# EAGLE board LinxBreakout (EAGLE 7.7.0)
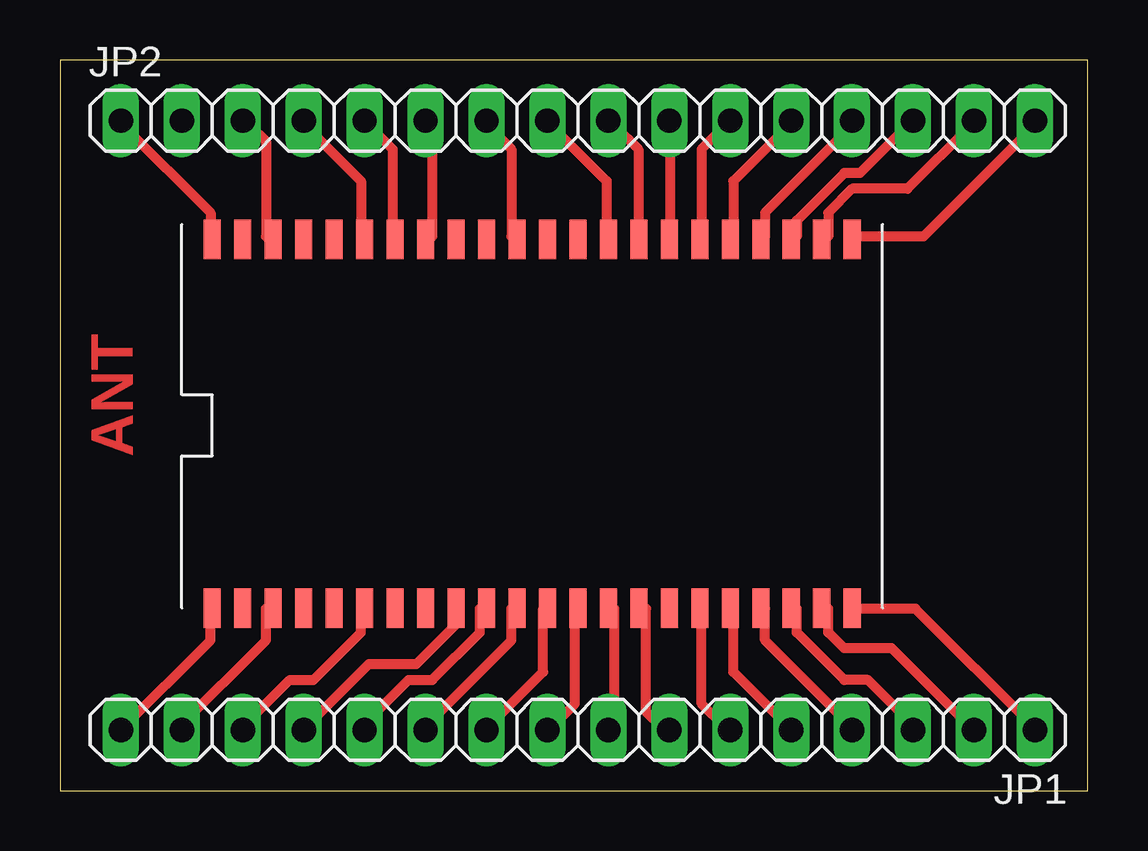
[diagram p0: board, top side]
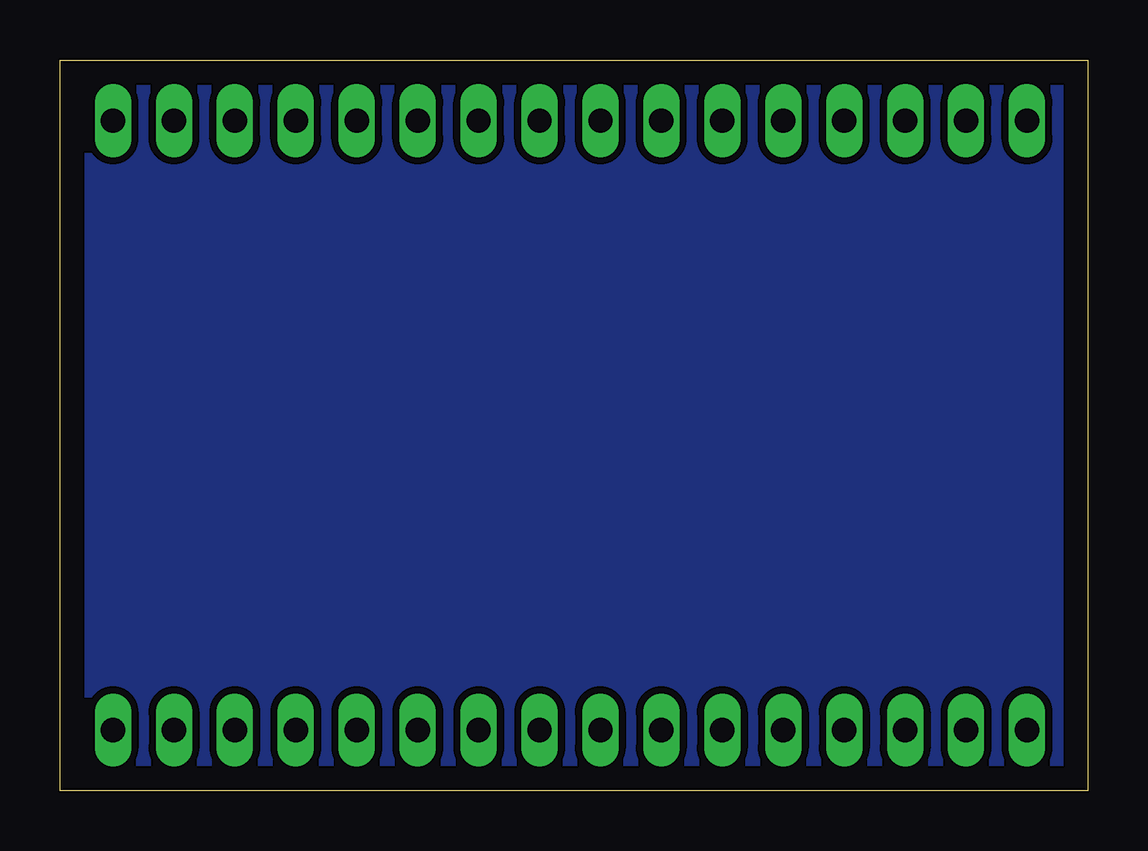
[diagram p1: board, bottom side, seen from below]

Size 42.85 x 30.47 mm. Coordinates in mm from the lower left corner, seen from the top.
Outline: 0,0 42.85,0 42.85,30.47 0,30.47 0,0
Copper layers (1*16): Top 0.035mm / dielectric 1.5mm / Bottom 0.035mm
Design rules "default *": minimum track width 16mil, minimum drill 24mil, track to track 10mil, track to pad 10mil, pad to pad 8mil, via to via 8mil, smd to smd 8mil, copper to edge 40mil, drill to drill 8mil, minimum pad ring 10mil, minimum via ring 8mil, stop-mask expansion 4mil, vias tented up to drill 0mil, thermal gap 10mil

## Footprints (pad centres in the part's own frame; a part is rotated, then mirrored left to right if it is on the bottom)
1X16 = drill 1.016 long: 1 -19.05,0; 2 -16.51,0; 3 -13.97,0; 4 -11.43,0; 5 -8.89,0; 6 -6.35,0; 7 -3.81,0; 8 -1.27,0; 9 1.27,0; 10 3.81,0; 11 6.35,0; 12 8.89,0; 13 11.43,0; 14 13.97,0; 15 16.51,0; 16 19.05,0
TRM-900-NT = smd 0.711 x 1.651: PIN1-GND 0,0; PIN2-NC 1.27,0; PIN3-GND 2.54,0; PIN4-NC 3.81,0; PIN5-NC 5.08,0; PIN6-GND 6.35,0; PIN7-NC 7.62,0; PIN8-NC 8.89,0; PIN9-TRPT/PKT 10.16,0; PIN10-CHN_SEL0 11.43,0; PIN11-GND 12.7,0; PIN12-CHN_SEL1 13.97,0; PIN13-CHN_SEL2 15.24,0; PIN14-LVL_ADJ 16.51,0; PIN15-READY 17.78,0; PIN16-NC 19.05,0; PIN17-GND 20.32,0; PIN18-T/R_SEL 21.59,0; PIN19-BAUD0 22.86,0; PIN20-BAUD1 24.13,0; PIN21-RSSI 25.4,0; PIN22-GND 26.67,0; PIN23-GND 26.67,15.367; PIN24-POWER_DOWN 25.4,15.367; PIN25-VCC 24.13,15.367; PIN26-STANDBY 22.86,15.367; PIN27-CMD_DATA_IN 21.59,15.367; PIN28-GND 20.32,15.367; PIN29-CMD_DATA_OUT 19.05,15.367; PIN30-CMD_DATA_TYPE 17.78,15.367; PIN31-CMD_DATA_BAUD 16.51,15.367; PIN32-NC 15.24,15.367; PIN33-NC 13.97,15.367; PIN34-GND 12.7,15.367; PIN35-NC 11.43,15.367; PIN36-NC 10.16,15.367; PIN37-DATA_OUT 8.89,15.367; PIN38-DATA_IN 7.62,15.367; PIN39-GND 6.35,15.367; PIN40-NC 5.08,15.367; PIN41-NC 3.81,15.367; PIN42-GND 2.54,15.367; PIN43-ANTENNA 1.27,15.367; PIN44-GND 0,15.367

## Placement (x,y rotation side)
JP1  [1X16]  21.59,2.54 180 top
JP2  [1X16]  21.59,27.94 0 top
U$1  TRM-900-NT  [TRM-900-NT]  6.35,7.62 0 top

## Library data of the parts
JP1 JP2 = pinhead
U$1 = LinxICDescription

## Nets
N$1: JP1.16 U$1.PIN1-GND
N$2: JP1.15 U$1.PIN3-GND
N$3: JP1.14 U$1.PIN6-GND
N$4: JP1.13 U$1.PIN9-TRPT/PKT
N$5: JP1.12 U$1.PIN10-CHN_SEL0
N$6: JP1.11 U$1.PIN11-GND
N$7: JP1.10 U$1.PIN12-CHN_SEL1
N$8: JP1.9 U$1.PIN13-CHN_SEL2
N$9: JP1.8 U$1.PIN14-LVL_ADJ
N$10: JP1.7 U$1.PIN15-READY
N$11: JP1.6 U$1.PIN17-GND
N$12: JP1.5 U$1.PIN18-T/R_SEL
N$13: JP1.4 U$1.PIN19-BAUD0
N$14: JP1.3 U$1.PIN20-BAUD1
N$15: JP1.2 U$1.PIN21-RSSI
N$16: JP1.1 U$1.PIN22-GND
N$17: JP2.1 U$1.PIN44-GND
N$19: JP2.3 U$1.PIN42-GND
N$20: JP2.4 U$1.PIN39-GND
N$21: JP2.5 U$1.PIN38-DATA_IN
N$22: JP2.6 U$1.PIN37-DATA_OUT
N$23: JP2.7 U$1.PIN34-GND
N$24: JP2.8 U$1.PIN31-CMD_DATA_BAUD
N$25: JP2.9 U$1.PIN30-CMD_DATA_TYPE
N$26: JP2.10 U$1.PIN29-CMD_DATA_OUT
N$27: JP2.11 U$1.PIN28-GND
N$28: JP2.12 U$1.PIN27-CMD_DATA_IN
N$29: JP2.13 U$1.PIN26-STANDBY
N$30: JP2.14 U$1.PIN25-VCC
N$31: JP2.15 U$1.PIN24-POWER_DOWN
N$32: JP2.16 U$1.PIN23-GND

## Tracks (layer width: path | path; a pad name or v marks a point on that pad's centre or on a via)
N$1
  Top 0.406: JP1.16 6.27,6.27 6.27,7.59 U$1.PIN1-GND
N$2
  Top 0.406: U$1.PIN3-GND 8.59,7.59 8.59,6.27 4.95,2.64 JP1.15
N$3
  Top 0.406: U$1.PIN6-GND 12.55,7.59 12.55,6.6 10.57,4.62 9.58,4.62 7.59,2.64 JP1.14
N$4
  Top 0.406: U$1.PIN9-TRPT/PKT 16.51,6.93 14.86,5.28 12.88,5.28 10.24,2.64 JP1.13
N$5
  Top 0.406: U$1.PIN10-CHN_SEL0 17.5,7.59 17.5,6.6 15.52,4.62 14.53,4.62 12.55,2.64 JP1.12
N$6
  Top 0.406: U$1.PIN11-GND 18.82,7.59 18.82,6.27 15.19,2.64 JP1.11
N$7
  Top 0.406: U$1.PIN12-CHN_SEL1 20.14,7.59 20.14,4.95 17.83,2.64 JP1.10
N$8
  Top 0.406: U$1.PIN13-CHN_SEL2 21.46,7.59 21.46,3.63 20.47,2.64 JP1.9
N$9
  Top 0.406: U$1.PIN14-LVL_ADJ 23.11,7.59 23.11,2.64 JP1.8
N$10
  Top 0.406: U$1.PIN15-READY 24.43,7.59 24.43,3.3 25.09,2.64 JP1.7
N$11
  Top 0.406: U$1.PIN17-GND 26.75,7.59 26.75,3.63 27.74,2.64 JP1.6
N$12
  Top 0.406: JP1.5 28.07,4.95 28.07,7.59 U$1.PIN18-T/R_SEL
N$13
  Top 0.406: U$1.PIN19-BAUD0 29.39,7.59 29.39,6.27 33.02,2.64 JP1.4
N$14
  Top 0.406: U$1.PIN20-BAUD1 30.71,7.59 30.71,6.6 32.69,4.62 33.68,4.62 35.66,2.64 JP1.3
N$15
  Top 0.406: U$1.PIN21-RSSI 32.03,7.59 32.03,6.6 32.69,5.94 34.67,5.94 37.97,2.64 JP1.2
N$16
  Top 0.406: U$1.PIN22-GND 33.02,7.59 35.66,7.59 40.62,2.64 JP1.1
N$17
  Top 0.406: U$1.PIN44-GND 6.27,23.11 6.27,24.11 2.64,27.74 JP2.1
N$18
  pour Bottom (isolate 0.305): 0,30.48 43.18,30.48 43.18,0 0,0
N$19
  Top 0.406: U$1.PIN42-GND 8.59,23.11 8.59,27.08 7.92,27.74 JP2.3
N$20
  Top 0.406: U$1.PIN39-GND 12.55,23.11 12.55,25.43 10.24,27.74 JP2.4
N$21
  Top 0.406: U$1.PIN38-DATA_IN 13.87,23.11 13.87,26.75 12.88,27.74 JP2.5
N$22
  Top 0.406: U$1.PIN37-DATA_OUT 15.52,23.11 15.52,27.74 JP2.6
N$23
  Top 0.406: U$1.PIN34-GND 18.82,23.11 18.82,26.75 17.83,27.74 JP2.7
N$24
  Top 0.406: U$1.PIN31-CMD_DATA_BAUD 22.78,23.11 22.78,25.43 20.47,27.74 JP2.8
N$25
  Top 0.406: U$1.PIN30-CMD_DATA_TYPE 24.11,23.11 24.11,26.75 23.11,27.74 JP2.9
N$26
  Top 0.406: U$1.PIN29-CMD_DATA_OUT 25.43,23.11 25.43,27.74 JP2.10
N$27
  Top 0.406: JP2.11 26.75,26.75 26.75,23.11 U$1.PIN28-GND
N$28
  Top 0.406: U$1.PIN27-CMD_DATA_IN 28.07,23.11 28.07,25.43 30.38,27.74 JP2.12
N$29
  Top 0.406: U$1.PIN26-STANDBY 29.39,23.11 29.39,24.11 33.02,27.74 JP2.13
N$30
  Top 0.406: U$1.PIN25-VCC 30.71,23.11 30.71,23.77 32.69,25.76 33.35,25.76 35.33,27.74 JP2.14
N$31
  Top 0.406: U$1.PIN24-POWER_DOWN 32.03,23.11 32.03,24.11 33.02,25.09 35.33,25.09 37.97,27.74 JP2.15
N$32
  Top 0.406: U$1.PIN23-GND 33.02,23.11 35.99,23.11 40.62,27.74 JP2.16

## Text on the board
Top: ANT